# EAGLE board PLCC32 1 to 1 (EAGLE 4.16)
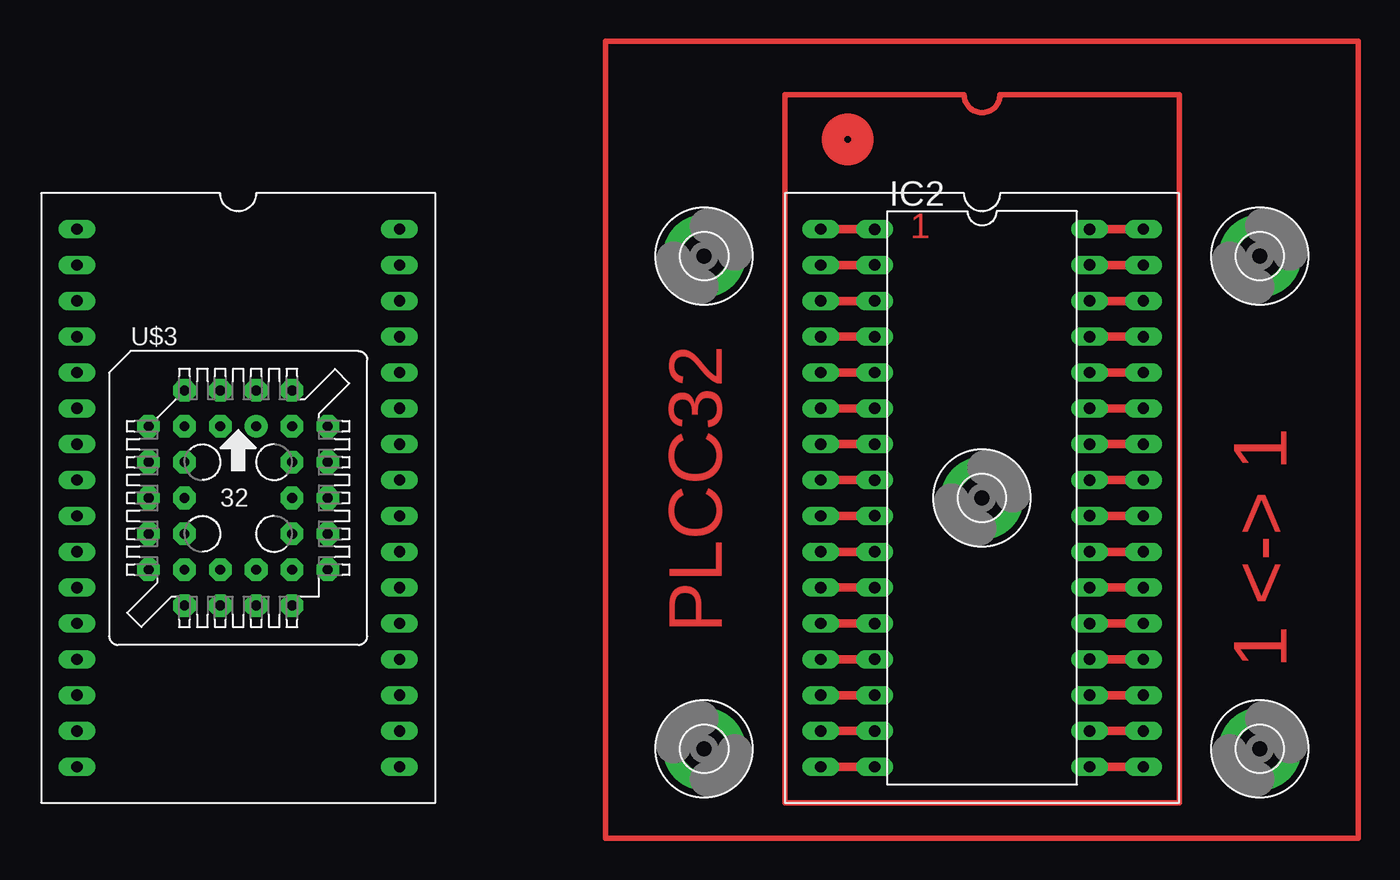
[diagram p0: board, top side]
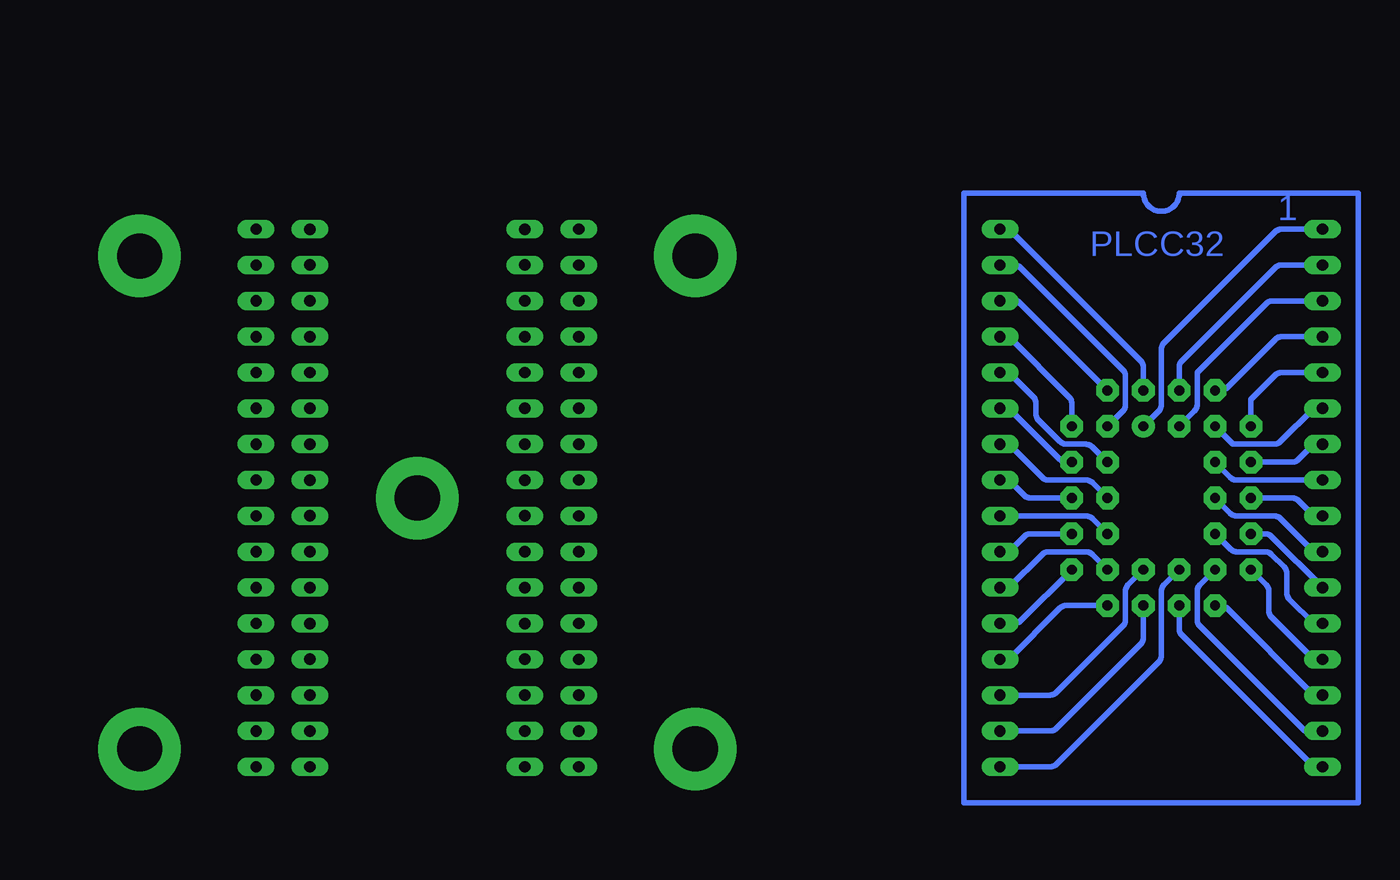
[diagram p1: board, bottom side, seen from below]

No outline drawn. Coordinates in mm, seen from the top.
Copper layers (1*16): Top 0.035mm / dielectric 1.5mm / Bottom 0.035mm
Design rules "default": minimum track width 10mil, minimum drill 24mil, track to track 8mil, track to pad 8mil, pad to pad 8mil, via to via 8mil, smd to smd 8mil, copper to edge 40mil, drill to drill 8mil, minimum pad ring 10mil, minimum via ring 8mil, stop-mask expansion 4mil, vias tented up to drill 0mil, thermal gap 10mil

## Footprints (pad centres in the part's own frame; a part is rotated, then mirrored left to right if it is on the bottom)
3,2-PAD = drill 3.2 pad 5.842 round: B3,2 0,0
DIL32 = drill 0.813 long: 1 -19.05,-7.62; 2 -16.51,-7.62; 3 -13.97,-7.62; 4 -11.43,-7.62; 5 -8.89,-7.62; 6 -6.35,-7.62; 7 -3.81,-7.62; 8 -1.27,-7.62; 9 1.27,-7.62; 10 3.81,-7.62; 11 6.35,-7.62; 12 8.89,-7.62; 13 11.43,-7.62; 14 13.97,-7.62; 15 16.51,-7.62; 16 19.05,-7.62; 17 19.05,7.62; 18 16.51,7.62; 19 13.97,7.62; 20 11.43,7.62; 21 8.89,7.62; 22 6.35,7.62; 23 3.81,7.62; 24 1.27,7.62; 25 -1.27,7.62; 26 -3.81,7.62; 27 -6.35,7.62; 28 -8.89,7.62; 29 -11.43,7.62; 30 -13.97,7.62; 31 -16.51,7.62; 32 -19.05,7.62
DIP32-9 = drill 0.8 long: 1 -11.43,19.05; 2 -11.43,16.51; 3 -11.43,13.97; 4 -11.43,11.43; 5 -11.43,8.89; 6 -11.43,6.35; 7 -11.43,3.81; 8 -11.43,1.27; 9 -11.43,-1.27; 10 -11.43,-3.81; 11 -11.43,-6.35; 12 -11.43,-8.89; 13 -11.43,-11.43; 14 -11.43,-13.97; 15 -11.43,-16.51; 16 -11.43,-19.05; 17 11.43,-19.05; 18 11.43,-16.51; 19 11.43,-13.97; 20 11.43,-11.43; 21 11.43,-8.89; 22 11.43,-6.35; 23 11.43,-3.81; 24 11.43,-1.27; 25 11.43,1.27; 26 11.43,3.81; 27 11.43,6.35; 28 11.43,8.89; 29 11.43,11.43; 30 11.43,13.97; 31 11.43,16.51; 32 11.43,19.05
PLCC-SR32 = drill 0.7 pad 1.6 round: 1 1.27,5.08 | drill 0.7 pad 1.6 octagon: 2 -1.27,7.62; 3 -1.27,5.08; 4 -3.81,7.62; 5 -6.35,5.08; 6 -3.81,5.08; 7 -6.35,2.54; 8 -3.81,2.54; 9 -6.35,0; 10 -3.81,0; 11 -6.35,-2.54; 12 -3.81,-2.54; 13 -6.35,-5.08; 14 -3.81,-7.62; 15 -3.81,-5.08; 16 -1.27,-7.62; 17 -1.27,-5.08; 18 1.27,-7.62; 19 1.27,-5.08; 20 3.81,-7.62; 21 6.35,-5.08; 22 3.81,-5.08; 23 6.35,-2.54; 24 3.81,-2.54; 25 6.35,0; 26 3.81,0; 27 6.35,2.54; 28 3.81,2.54; 29 6.35,5.08; 30 3.81,7.62; 31 3.81,5.08; 32 1.27,7.62

## Placement (x,y rotation side)
H1  MOUNT-PAD-ROUND3.2  [3,2-PAD]  48.9,20.95 90 top
H2  MOUNT-PAD-ROUND3.2  [3,2-PAD]  88.27,20.95 0 top
H3  MOUNT-PAD-ROUND3.2  [3,2-PAD]  48.9,55.88 0 top
H4  MOUNT-PAD-ROUND3.2  [3,2-PAD]  88.27,55.88 0 top
H5  MOUNT-PAD-ROUND3.2  [3,2-PAD]  68.58,38.73 0 top
IC2  [DIL32]  68.58,38.73 270 top
U$1  DIP32-9  [DIP32-9]  15.88,38.73 0 top
U$2  DIP32-9  [DIP32-9]  68.58,38.73 0 top
U$3  PLCC32  [PLCC-SR32]  15.88,38.73 0 top

## Library data of the parts
H1-H5 = holes
IC2 = ic-package
U$1-U$3 = GB-Spcl

## Nets
N$1: IC2.1 U$2.1
N$2: IC2.2 U$2.2
N$3: IC2.3 U$2.3
N$4: IC2.4 U$2.4
N$5: IC2.5 U$2.5
N$6: IC2.6 U$2.6
N$7: IC2.7 U$2.7
N$8: IC2.8 U$2.8
N$9: IC2.9 U$2.9
N$10: IC2.10 U$2.10
N$11: IC2.11 U$2.11
N$12: IC2.12 U$2.12
N$13: IC2.13 U$2.13
N$14: IC2.14 U$2.14
N$15: IC2.15 U$2.15
N$16: IC2.16 U$2.16
N$17: IC2.32 U$2.32
N$18: IC2.31 U$2.31
N$19: IC2.30 U$2.30
N$20: IC2.29 U$2.29
N$21: IC2.28 U$2.28
N$22: IC2.27 U$2.27
N$23: IC2.26 U$2.26
N$24: IC2.25 U$2.25
N$25: IC2.24 U$2.24
N$26: IC2.23 U$2.23
N$27: IC2.22 U$2.22
N$28: IC2.21 U$2.21
N$29: IC2.20 U$2.20
N$30: IC2.19 U$2.19
N$31: IC2.18 U$2.18
N$32: IC2.17 U$2.17
N$33: U$1.5 U$3.5
N$34: U$1.6 U$3.6
N$35: U$1.7 U$3.7
N$36: U$1.8 U$3.8
N$37: U$1.9 U$3.9
N$38: U$1.10 U$3.10
N$39: U$1.11 U$3.11
N$40: U$1.12 U$3.12
N$41: U$1.13 U$3.13
N$42: U$1.14 U$3.14
N$43: U$1.15 U$3.15
N$44: U$1.16 U$3.16
N$45: U$1.4 U$3.4
N$46: U$1.3 U$3.3
N$47: U$1.2 U$3.2
N$48: U$1.1 U$3.1
N$49: U$1.21 U$3.21
N$50: U$1.22 U$3.22
N$51: U$1.23 U$3.23
N$52: U$1.24 U$3.24
N$53: U$1.25 U$3.25
N$54: U$1.26 U$3.26
N$55: U$1.27 U$3.27
N$56: U$1.28 U$3.28
N$57: U$1.29 U$3.29
N$58: U$1.30 U$3.30
N$59: U$1.31 U$3.31
N$60: U$1.32 U$3.32
N$61: U$1.20 U$3.20
N$62: U$1.19 U$3.19
N$63: U$1.18 U$3.18
N$64: U$1.17 U$3.17

## Tracks (layer width: path | path; a pad name or v marks a point on that pad's centre or on a via)
N$1
  Top 0.61: IC2.1 U$2.1
N$2
  Top 0.61: IC2.2 U$2.2
N$3
  Top 0.61: IC2.3 U$2.3
N$4
  Top 0.61: IC2.4 U$2.4
N$5
  Top 0.61: IC2.5 U$2.5
N$6
  Top 0.61: IC2.6 U$2.6
N$7
  Top 0.61: IC2.7 U$2.7
N$8
  Top 0.61: IC2.8 U$2.8
N$9
  Top 0.61: IC2.9 U$2.9
N$10
  Top 0.61: IC2.10 U$2.10
N$11
  Top 0.61: IC2.11 U$2.11
N$12
  Top 0.61: IC2.12 U$2.12
N$13
  Top 0.61: IC2.13 U$2.13
N$14
  Top 0.61: IC2.14 U$2.14
N$15
  Top 0.61: IC2.15 U$2.15
N$16
  Top 0.61: IC2.16 U$2.16
N$17
  Top 0.61: IC2.32 U$2.32
N$18
  Top 0.61: IC2.31 U$2.31
N$19
  Top 0.61: IC2.30 U$2.30
N$20
  Top 0.61: IC2.29 U$2.29
N$21
  Top 0.61: IC2.28 U$2.28
N$22
  Top 0.61: IC2.27 U$2.27
N$23
  Top 0.61: IC2.26 U$2.26
N$24
  Top 0.61: IC2.25 U$2.25
N$25
  Top 0.61: IC2.24 U$2.24
N$26
  Top 0.61: IC2.23 U$2.23
N$27
  Top 0.61: IC2.22 U$2.22
N$28
  Top 0.61: IC2.21 U$2.21
N$29
  Top 0.61: IC2.20 U$2.20
N$30
  Top 0.61: IC2.19 U$2.19
N$31
  Top 0.61: IC2.18 U$2.18
N$32
  Top 0.61: IC2.17 U$2.17
N$33
  Bottom 0.406: U$1.5 7.36,47.62 arc-45 7.81,47.44 9.53,45.72 U$3.5
N$34
  Bottom 0.406: U$3.6 10.79,42.55 7.88,42.55 arc-45 7.43,42.73 5.08,45.09 U$1.6
N$35
  Bottom 0.406: U$3.7 6.61,41.27 arc-45 6.16,41.46 5.08,42.55 U$1.7
N$36
  Bottom 0.406: U$1.8 10.53,40.01 arc45 10.98,40.19 U$3.8
N$37
  Bottom 0.406: U$3.9 6.61,38.73 arc45 6.16,38.55 5.08,37.47 U$1.9
N$38
  Bottom 0.406: U$3.10 10.98,37.65 arc-45 10.53,37.47 7.88,37.47 arc45 7.43,37.28 5.08,34.92 U$1.10
N$39
  Bottom 0.406: U$3.11 8.52,36.2 arc45 8.07,36.01 U$1.11
N$40
  Bottom 0.406: U$3.12 10.98,35.11 arc-45 10.53,34.92 8.52,34.92 arc45 8.07,34.74 7.17,33.84 arc45 6.99,33.39 6.99,32.01 arc-45 6.8,31.56 5.08,29.84 U$1.12
N$41
  Bottom 0.406: U$3.13 8.44,32.57 arc45 8.26,32.12 8.26,30.74 arc-45 8.07,30.29 5.08,27.3 U$1.13
N$42
  Bottom 0.406: U$3.14 11.69,31.11 arc45 11.24,30.93 5.08,24.77 U$1.14
N$43
  Bottom 0.406: U$3.15 13.15,32.57 arc-45 13.34,32.12 13.34,30.11 arc-45 13.15,29.66 5.71,22.23 U$1.15
N$44
  Bottom 0.406: U$3.16 14.61,29.47 arc-45 14.42,29.02 5.08,19.68 U$1.16
N$45
  Bottom 0.406: U$1.4 7.36,50.16 arc-45 7.81,49.98 11.24,46.54 arc45 11.69,46.35 U$3.4
N$46
  Bottom 0.406: U$3.3 13.52,44.9 arc-45 13.34,45.35 13.34,47.62 8.44,52.52 arc45 7.99,52.7 U$1.3
N$47
  Bottom 0.406: U$1.2 7.36,55.24 arc-45 7.81,55.06 14.42,48.45 arc-45 14.61,48 U$3.2
N$48
  Bottom 0.406: U$3.1 16.06,44.9 arc-45 15.88,45.35 15.88,49.27 arc45 15.69,49.72 7.81,57.6 arc45 7.36,57.78 U$1.1
N$49
  Bottom 0.406: U$3.21 25.85,30.03 arc45 26.3,29.84 U$1.21
N$50
  Bottom 0.406: U$3.22 20.77,34.74 arc-45 21.22,34.92 23.87,34.92 arc-45 24.32,34.74 26.67,32.38 U$1.22
N$51
  Bottom 0.406: U$3.23 25.14,36.2 arc-45 25.59,36.01 26.67,34.92 U$1.23
N$52
  Bottom 0.406: U$3.24 20.77,37.28 arc-45 21.22,37.47 U$1.24
N$53
  Bottom 0.406: U$3.25 25.14,38.73 arc45 25.59,38.92 26.67,40.01 U$1.25
N$54
  Bottom 0.406: U$3.26 20.77,39.82 arc-45 21.22,40.01 23.87,40.01 arc45 24.32,40.19 26.67,42.55 U$1.26
N$55
  Bottom 0.406: U$3.27 22.6,41.27 arc45 23.05,41.46 26.67,45.09 U$1.27
N$56
  Bottom 0.406: U$3.28 20.77,42.36 arc-45 21.22,42.55 22.6,42.55 arc45 23.05,42.73 24.58,44.26 arc45 24.77,44.71 24.77,45.46 arc-45 24.95,45.91 26.67,47.62 U$1.28
N$57
  Bottom 0.406: U$3.29 22.23,45.46 arc-45 22.41,45.91 26.67,50.16 U$1.29
N$58
  Bottom 0.406: U$3.30 26.04,52.7 U$1.30
N$59
  Bottom 0.406: U$3.31 18.6,44.9 arc-45 18.41,45.35 18.41,47.36 arc-45 18.6,47.81 25.85,55.06 arc-45 26.3,55.24 U$1.31
N$60
  Bottom 0.406: U$3.32 17.14,48 arc-45 17.33,48.45 26.67,57.78 U$1.32
N$61
  Bottom 0.406: U$3.20 22.6,31.11 arc-45 23.05,30.93 26.67,27.3 U$1.20
N$62
  Bottom 0.406: U$3.19 18.23,32.57 arc-45 18.41,32.12 18.41,30.11 arc45 18.6,29.66 23.31,24.95 arc45 23.76,24.77 U$1.19
N$63
  Bottom 0.406: U$3.18 17.14,28.84 arc45 17.33,28.39 23.31,22.41 arc45 23.76,22.23 U$1.18
N$64
  Bottom 0.406: U$3.17 15.69,32.57 arc-45 15.88,32.12 15.88,27.57 arc45 16.06,27.12 23.31,19.87 arc45 23.76,19.68 U$1.17
N$65
  Bottom 0.406: 1.91,60.33 1.91,17.14 29.84,17.14 29.84,60.33 17.14,60.33 arc-180 14.61,60.33 1.91,60.33
N$66
  Top 0.406: 67.31,67.31 54.61,67.31 54.61,17.14 82.55,17.14 82.55,67.31 69.85,67.31 arc-180 67.31,67.31
N$67
  Top 0.406: 41.91,71.12 41.91,14.61 95.25,14.61 95.25,71.12 41.91,71.12
(copper drawn outside any net)
  shapes: Top circle x2

## Text on the board
Top: 1 | PLCC32 | 1 <-> 1
Bottom: 1 | PLCC32